# Altium PCB Base.PcbDoc (part 2 of 2)
Units mm, origin at the board's own origin, x right, y up, seen from the top; angles counter-clockwise.
Board outline 100 x 100 mm, 4 copper layers (Top Layer, Layer 1, Layer 2, Bottom Layer), stack 1.56 mm thick; 130 components, 105 nets, 399 pads, 222 vias.
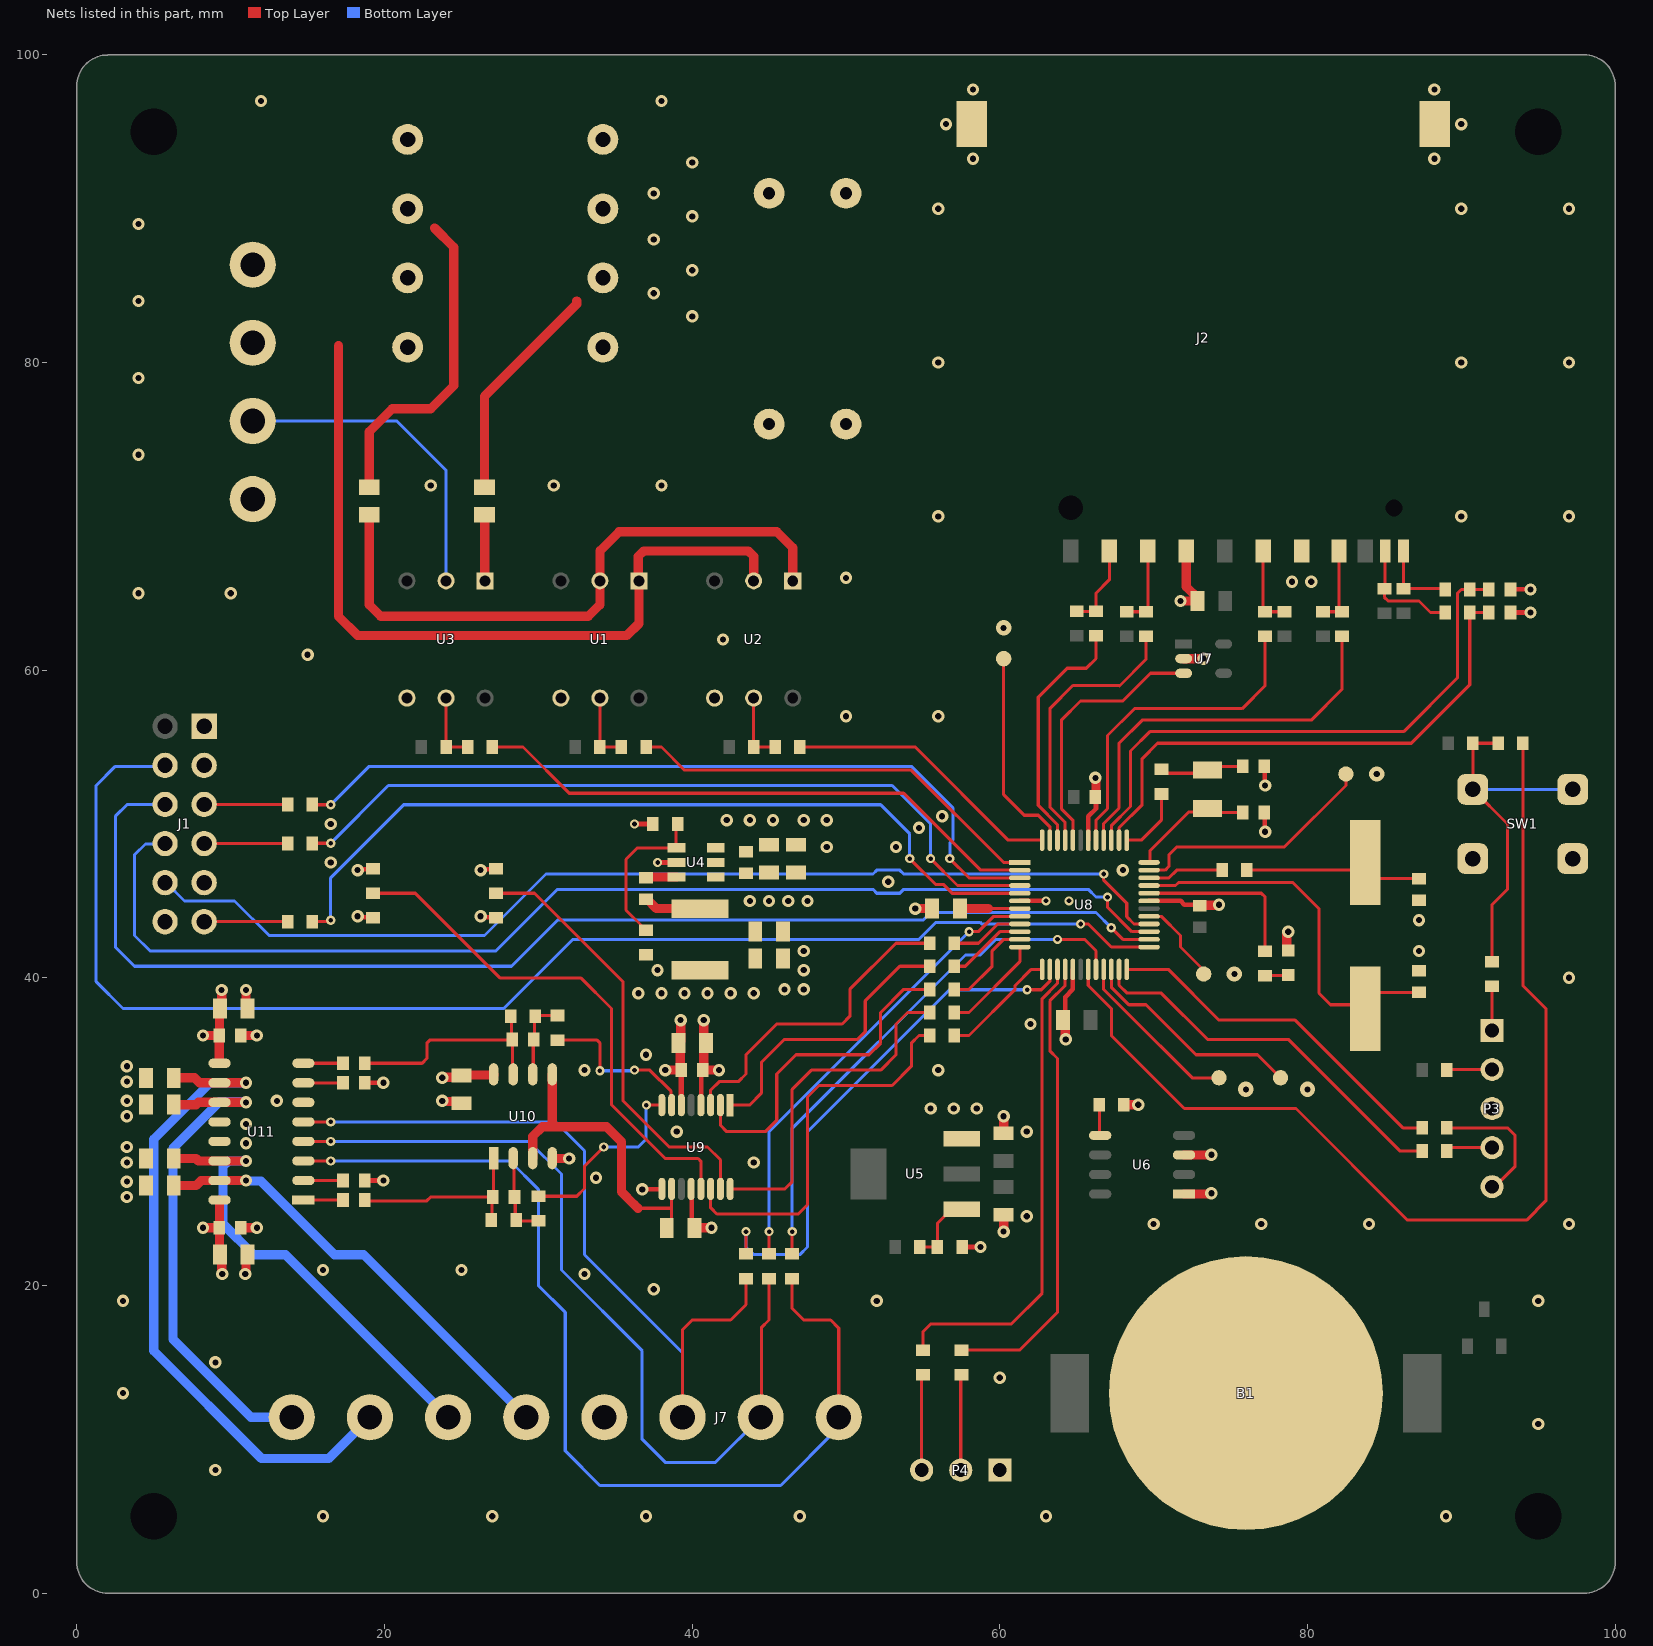
[diagram p4: the nets of this part, all layers, seen from the top]

## Via types
v1: diameter 0.8, hole 0.4, Top Layer to Bottom Layer, tented both sides, 190 vias
v2: diameter 0.6, hole 0.3, Top Layer to Bottom Layer, tented both sides, 27 vias
v3: diameter 1, hole 0.4, Top Layer to Bottom Layer, tented bottom, 5 vias

## Nets (pads, with @x,y where several pads share a name; then routed paths per layer and width w, separated by ;. In a path a pad name is that pad's centre, name@x,y a point inside that pad or via, vN(x,y) a via of type N, cw(c..) or ccw(c..) an arc to the next point about the centre after c; other vN are vias at no path point) (continued)
+5V: C7.1 C8.1 C23.1 C24.2 C26.1 C27.1 C28.2 C29.2 C39.1 L1.2 R11.2 R40.2 R41.2 U5.3 U9.6 U10.8 U11.9 U11.16 | length 23.9
  Top Layer w0.3: v1(18.25,47) 18.3,47.05 R40.2@19.177,47.05 ; v1(26.25,47) 26.3,47.05 R41.2@27.2,47.05
  Top Layer w0.36: U9.6@39.298,31.725 39.299,31.726 39.299,33.999 C24.2@39.3,34
  Top Layer w0.6: v1(8.2,23.75) C28.2@9.25,23.75 ; v1(8.2,36.25) C29.2@9.25,36.25 ; U11.16@9.275,25.555 9.263,25.555 9.263,23.763 C28.2@9.25,23.75 ; U11.9@9.275,34.445 9.25,34.445 C29.2@9.25,36.25 ; v1(9.412,39.212) 9.412,38.112 C26.1@9.3,38 9.275,37.975 9.275,36.275 C29.2@9.25,36.25 ; v1(9.45,20.75) 9.412,20.788 9.412,21.888 C27.1@9.3,22 9.275,22.025 9.275,23.725 C28.2@9.25,23.75 ; v1(23.75,33.5) 23.788,33.538 24.888,33.538 25.037,33.687 27.095,33.687 U10.8@27.095,33.725 ; v1(38.25,34) C24.2@39.3,34 39.225,34.075 39.225,35.875 39.25,35.9 v1(39.25,37.25)
  other v1: 55.5,31.5 57,31.5 58.5,31.5 36.5,39 38,39 39.5,39 41,39 42.5,39 44,39 37.75,40.5
+12V: C1.1 C2.1 C4.1 C5.1 C6.1 D1.K D3.K J1.1 R7.2 U4.3 U4.5 | length 16.2
  Top Layer w0.3: v2(37.75,47.5) U4.5@38.975,47.5
  Top Layer w0.6: R7.2@26.5,71.9 26.5,77.8 32.5,83.8 32.5,84 ; C2.1@44.621,91 C2.1@45,91
  other v1: 48.75,48.5 42.25,50.25 43.75,50.25 45.25,50.25 47.25,50.25 48.75,50.25 40,83 37.5,84.5 40,86 37.5,88 40,89.5 37.5,91 40,93
AC1: D1.A D2.K J3.1 R5.2 | length 21.5
  Top Layer w0.6: R5.2@19,71.9 19,75.5 20.5,77 23,77 24.5,78.5 24.5,87.5 23.25,88.75 ; D1.A@21.5,90 D1.A@21.879,90
AC2: D3.A D4.K J3.2 U1.1 U2.2 | length 52.1
  Top Layer w0.6: J3.2@11.43,81.28 J3.2@11.615,81.095 ; 17,81.095 17,63.5 18.25,62.25 35.75,62.25 36.54,63.04 36.54,66.025 36.5,66.065 36.5,67.399 36.851,67.75 43.649,67.75 44,67.399 U2.2@44,65.81 ; D4.K@21.405,81.095 D4.K@21.5,81
BCK: R42.2 U9.1 | length 19.1
  Top Layer w0.2: U9.1@42.473,31.725 43.725,31.725 44.5,32.5 44.5,34.5 46,36 50.75,36 51.25,36.5 51.25,38.5 53.5,40.75 R42.2@55.45,40.75
BST: C3.2 U4.6 | length 2
  Top Layer w0.6: C3.2@37,46.45 37.075,46.45 37.175,46.55 U4.6@38.975,46.55
"BTN DOWN": J1.6 U8.26 | length 81.9
  Top Layer w0.2: v2(67.25,43.25) 68,42.5 U8.26@69.7,42.5
  Bottom Layer w0.2: J1.6@5.73,51.27 3.27,51.27 2.5,50.5 2.5,42 3.75,40.75 28.25,40.75 31.25,43.75 55,43.75 55.5,44.25 66.25,44.25 v2(67.25,43.25)
"BTN PLAY": J1.10 U8.28 | length 69.4
  Top Layer w0.2: v2(66.75,46.75) 66.75,46.352 68.25,44.852 68.25,43.976 68.726,43.5 U8.28@69.7,43.5
  Bottom Layer w0.2: J1.10@5.73,46.19 5.81,46.19 7,45 10.25,45 12.5,42.75 26.5,42.75 30.5,46.75 51.75,46.75 52,47 53.5,47 53.75,46.75 v2(66.75,46.75)
"BTN SET": J1.4 U8.25 | length 89.9
  Top Layer w0.2: v2(65.25,43.5) 65.75,43.5 67.25,42 U8.25@69.7,42
  Bottom Layer w0.2: J1.4@5.73,53.81 5.67,53.75 2.5,53.75 1.25,52.5 1.25,39.75 3,38 27.75,38 32.25,42.5 54.75,42.5 55.852,43.602 58.725,43.602 58.827,43.5 v2(65.25,43.5)
"BTN UP": J1.8 U8.27 | length 77.3
  Top Layer w0.2: v2(67,45.25) 67,44.586 68.586,43 U8.27@69.7,43
  Bottom Layer w0.2: J1.8@5.73,48.73 5.705,48.705 4.455,48.705 3.75,48 3.75,42.75 4.75,41.75 27.25,41.75 31.25,45.75 51.75,45.75 52,45.5 53.5,45.5 53.75,45.75 65.75,45.75 66.25,45.25 v2(67,45.25)
"DAC BCK": R42.1 U8.10 | length 5.2
  Top Layer w0.2: R42.1@57.05,40.75 57.75,40.75 58.25,41.25 60,43 U8.10@61.3,43
"DAC DATA": R44.1 U8.11 | length 6.2
  Top Layer w0.2: R44.1@57.05,39.25 58,39.25 59.5,40.75 59.5,41.75 60.25,42.5 U8.11@61.3,42.5
"DAC LRCK": R43.1 U8.9 | length 4.8
  Top Layer w0.2: R43.1@57.05,42.25 58.61,42.25 59.86,43.5 U8.9@61.3,43.5
"DAC MUTE": R45.1 U8.13 | length 7.6
  Top Layer w0.2: R45.1@57.05,36.25 58,36.25 61,39.25 61,39.5 62.05,40.55 U8.13@62.75,40.55
"DAC SCK": R46.1 U8.12 | length 6.6
  Top Layer w0.2: R46.1@57.05,37.75 58,37.75 61.3,41.05 U8.12@61.3,42
DATA: R44.2 U9.2 | length 21.9
  Top Layer w0.2: U9.2@41.838,31.725 41.838,30.412 42.25,30 44.75,30 45.5,30.75 45.5,33.75 46.75,35 51.5,35 52.25,35.75 52.25,37.75 53.75,39.25 R44.2@55.45,39.25
DEMP: R40.1 R47.2 U9.13 | length 34
  Top Layer w0.2: R40.1@19.25,45.5 22,45.5 27.5,40 32.75,40 34.75,38 34.75,31.75 38.25,28.25 40.392,28.25 40.568,28.074 U9.13@40.568,26.275
DN: J7.2 R55.2 U11.5 | length 51.2
  Top Layer w0.2: U11.5@14.725,30.635 v2(16.5,30.635) ; J7.2@39.37,11.43 39.37,17.12 40,17.75 42.5,17.75 43.5,18.75 R55.2@43.5,20.45
  Bottom Layer w0.2: v2(16.5,30.635) 31.115,30.635 33,28.75 33,22 39.37,15.63 J7.2@39.37,11.43
"DSP CLK": R16.1 U8.5 | length 54.3
  Top Layer w0.2: R16.1@15.3,43.65 16.319,43.65 16.419,43.75 v2(16.5,43.75) ; v2(54.138,47.75) 55.814,46.074 56.324,46.074 56.898,45.5 U8.5@61.3,45.5 U8.5@61.5,45.5
  Bottom Layer w0.2: v2(16.5,43.75) 16.5,46.5 21.25,51.25 52.25,51.25 54.138,49.362 v2(54.138,47.75)
"DSP DATA": R15.1 U8.4 | length 51.6
  Top Layer w0.2: R15.1@15.3,48.73 15.32,48.75 v2(16.5,48.75) ; v2(55.5,47.75) 57.25,46 U8.4@61.3,46
  Bottom Layer w0.2: v2(16.5,48.75) 20.25,52.5 53,52.5 55.5,50 v2(55.5,47.75)
"DSP LATCH": R14.1 U8.3 | length 52.3
  Top Layer w0.2: R14.1@15.3,51.27 15.32,51.25 v2(16.5,51.25) ; v2(56.75,47.75) 58,46.5 U8.3@61.3,46.5
  Bottom Layer w0.2: v2(16.5,51.25) 19,53.75 54.25,53.75 56.952,51.048 56.952,50.209 56.952,48.952 56.75,48.75 v2(56.75,47.75)
FB: R11.1 R13.2 U4.4 | length 10.6
  Top Layer w0.2: R11.1@37,43.1 36.925,43.1 36.7,43.325 36.7,43.4 35.7,44.4 35.7,47.7 36.45,48.45 U4.4@38.975,48.45 38.95,48.475 R13.2@38.95,50.25
FMT: R41.1 R48.2 U9.15 | length 28.2
  Top Layer w0.2: R48.2@27.25,45.5 29.75,45.5 35.5,39.75 35.5,32 38.5,29 41,29 41.838,28.162 U9.15@41.838,26.275
GND: B1.2 C1.2 C2.2 C4.2 C5.2 C6.2 C7.2 C8.2 C9.2 C10.2 C11.2 C12.1 C13.1 C14.2 C15.1 C16.1 C17.2 C18.2 C19.2 C20.2 C21.2 C22.2 C23.2 C24.1 C26.2 C27.2 C28.1 C29.1 C32.1 C34.1 C35.1 C36.1 C37.1 C38.1 C39.2 D2.A D4.A D6.K J1.3 J1.9 J1.12 J2.3 J2.6 J2.MP J4.2 J7.1 P3.3 P4.1 R9.2 R12.1 R13.1 R47.1 R48.1 SW1.1 U1.4 U2.4 U3.4 U4.1 U6.1 U6.3 U7.2 U8.6 U8.17 U8.31 U8.42 U9.4 U9.9 U9.12 U10.4 U11.6 U11.12 U11.13 | length 61.7
  Top Layer w0.3: U11.13@9.275,29.365 U11.13@9.332,29.308 ; v1@10.942,29.308 v1(11,29.25) ; v1(18.25,44) 18.3,43.95 19.2,43.95 R47.1@19.25,43.9 ; C32.1@18.7,26.825 v1(19.925,26.825) ; C34.1@18.7,33.175 v1(19.925,33.175) ; v1(26.25,44) 26.3,43.95 27.1,43.95 27.15,44 R48.1@27.25,43.9 ; v2(36.25,50) R13.1@37.45,50 ; v1(36.75,26.25) 38.002,26.25 U9.9@38.028,26.275 ; U9.12@39.933,26.275 39.961,26.246 39.961,23.939 C22.2@40.15,23.75 ; U9.4@40.568,31.725 40.596,31.754 40.596,33.896 C24.1@40.7,34 ; R12.1@57.546,22.5 v1(58.75,22.5) ; U8.6@61.3,45 v2(63,45) ; C14.2@64.1,37.25 64.25,37.4 64.25,38.75 64.749,39.249 64.749,39.499 U8.17@64.75,40.55 ; U8.42@65.75,48.95 65.75,50.5 66.25,51 66.25,51.6 C16.1@66.4,51.75 ; U8.31@69.7,45 71.75,45 72,44.75 C15.1@72.95,44.75 ; C21.2@77.2,50.75 77.225,50.725 77.225,49.525 v1(77.25,49.5) ; C20.2@77.2,53.75 77.225,53.725 77.225,52.525 v1(77.25,52.5) ; C13.1@93.2,63.75 v1(94.5,63.75) ; C12.1@93.2,65.25 v1(94.5,65.25)
  Top Layer w0.6: C28.1@10.65,23.75 v1(11.7,23.75) ; C29.1@10.65,36.25 v1(11.7,36.25) ; v1(10.95,20.75) 10.988,20.788 10.988,21.888 C27.2@11.1,22 ; v1(10.988,39.212) 10.988,38.112 C26.2@11.1,38 ; v1(23.75,32) 23.788,31.962 24.888,31.962 C39.2@25,31.85 ; U10.4@30.905,28.275 30.905,28.262 31.988,28.262 v1(32,28.25) ; C22.2@40.15,23.75 v1(41.25,23.75) ; v1(40.75,37.25) 40.75,35.9 C23.2@40.9,35.75 40.75,35.6 40.75,34.05 C24.1@40.7,34 v1(41.75,34) ; v1(54.5,44.5) C17.2@55.6,44.5 ; v1(60.25,23.5) C9.2@60.25,24.6 ; C10.2@60.25,29.9 v1(60.25,31) ; C14.2@64.1,37.25 64.25,37.1 64.25,36.038 v1(64.288,36) ; v1(66.212,53) 66.25,52.962 C16.1@66.25,51.9 ; R9.2@68.05,31.75 v1(69,31.75) ; v1(71.75,64.5) C11.2@72.85,64.5 72.85,64.7 72.12,65.43 J2.3@72.12,67.75 ; U7.2@71.95,60.75 v1(73.25,60.75) ; U6.1@71.975,25.945 73.641,25.945 73.696,26 v1(73.75,26) ; U6.3@71.975,28.485 73.735,28.485 v1(73.75,28.5) ; C15.1@72.95,44.75 72.975,44.725 74.225,44.725 v1(74.25,44.75) ; D6.K@78.75,41.802 78.723,41.802 78.648,41.877 78.648,42.898 v1(78.75,43)
  other v1: 16,5 27,5 37,5 47,5 63,5 89,5 9,8 95,11 3,13 60,14 9,15 3,19 52,19 95,19 37.5,19.75 33,20.75 16,21 25,21 70,24 77,24 84,24 97,24 61.75,24.5 3.25,25.75 3.25,26.75 33.75,27 3.25,28 44,28 3.25,29 39,30 61.75,30 11,30.5 3.25,31 3.25,32 13,32 3.25,33.25 33,34 56,34 3.25,34.25 37,35 62,37 46,39.25 47.25,39.25 97,40 47.25,40.5 47.25,41.75 87.25,41.75 87.25,43.75 43.75,45 45,45 46.25,45 47.5,45 52.75,46.25 68,47 16.5,47.5 53.25,48.5 54.75,49.75 16.5,50 56.25,50.5 50,57 56,57 15,61 42,62 4,65 10,65 79,65.75 80.25,65.75 50,66 56,70 90,70 97,70 23,72 31,72 38,72 4,74 4,79 56,80 90,80 97,80 4,84 4,89 56,90 90,90 97,90 58.25,93.25 88.25,93.25 56.5,95.5 90,95.5 11.971,97 38,97 58.25,97.75 88.25,97.75
  other v2: 64.5,45
  other v3: 76,32.75 80,32.75 75.25,40.25 84.5,53.25 60.25,62.75
"ICSP MCLR": R29.2 R33.1 R34.1 SW1.2 | length 23.7
  Top Layer w0.2: R29.2@92,41.05 92,44.75 93,45.75 93,50 SW1.2@90.75,52.25 R33.1@90.75,55.25 R34.1@92.4,55.25
  Bottom Layer w0.2: SW1.2@90.75,52.25 SW1.2@97.25,52.25
"ICSP PGC": R32.2 U8.24 | length 23.5
  Top Layer w0.2: U8.24@68.25,40.55 70.95,40.55 74.25,37.25 79.2,37.25 86.2,30.25 R32.2@87.45,30.25
"ICSP PGD": R31.2 U8.23 | length 25.2
  Top Layer w0.2: U8.23@67.75,40.55 67.75,39.525 68.275,39 70.5,39 73.5,36 78.75,36 86,28.75 R31.2@87.45,28.75
LDAC: R54.2 U9.7 | length 10.8
  Top Layer w0.2: R54.2@31.25,35.95 33.824,35.95 34,35.774 v2(34,33.959) ; v2(36.25,34) 37.25,34 38.634,32.616 38.634,31.754 U9.7@38.663,31.725
  Bottom Layer w0.2: v2(34,33.959) 36.209,33.959 v2(36.25,34)
LED: R35.1 U8.32 | length 11.2
  Top Layer w0.2: U8.32@69.7,45.5 77,45.5 77.248,45.252 R35.1@77.248,41.727
"LINE PULSE N": R6.1 U8.48 | length 18.3
  Top Layer w0.2: R6.1@47,55 54.5,55 60.55,48.95 U8.48@62.75,48.95
"LINE PULSE P": R4.1 U8.1 | length 27.4
  Top Layer w0.2: R4.1@37,55 38,55 39.5,53.5 54.25,53.5 60.25,47.5 U8.1@61.3,47.5
LINN: C34.2 U11.7 | length 2.6
  Top Layer w0.2: U11.7@14.725,33.175 C34.2@17.3,33.175
LINP: C33.2 U11.8 | length 2.6
  Top Layer w0.2: U11.8@14.725,34.445 C33.2@17.3,34.445
LOUTN: C38.2 J6.1 U11.11 | length 33
  Top Layer w0.6: C38.2@6.3,31.75 7.75,31.75 7.905,31.905 U11.11@9.275,31.905 v1(11,31.905)
  Bottom Layer w0.6: v1(11,31.905) 10.962,31.943 9.269,31.943 6.25,28.925 6.25,16.5 11.32,11.43 J6.1@13.97,11.43
LOUTP: C37.2 J6.2 U11.10 | length 44.2
  Top Layer w0.6: C37.2@6.3,33.5 7.65,33.5 7.975,33.175 U11.10@9.275,33.175 v1(11,33.175)
  Bottom Layer w0.6: v1(11,33.175) 8.675,33.175 5,29.5 5,15.75 12,8.75 16.37,8.75 J6.2@19.05,11.43
LRCK: R43.2 U9.3 | length 20.9
  Top Layer w0.2: U9.3@41.203,31.725 41.203,32.703 41.75,33.25 43,33.25 43.5,33.75 43.5,35 45.5,37 49.75,37 50.25,37.5 50.25,39.25 53.25,42.25 R43.2@55.45,42.25
MCLR: R34.2 U8.19 | length 69
  Top Layer w0.2: U8.19@65.75,40.55 65.75,39.5 67.25,38 67.25,36.25 72,31.5 79.25,31.5 86.5,24.25 94.25,24.25 95.5,25.5 95.5,38 94,39.5 R34.2@94,55.25
NetC18_1: C18.1 R36.1 X1.2 | length 11.8
  Top Layer w0.2: R36.1@76.05,47 83.25,47 X1.2@83.75,47.5 ; X1.2@83.75,47.3 84.6,46.45 C18.1@87.25,46.45
NetC20_1: C20.1 R39.1 X2.2 | length 5.7
  Top Layer w0.2: R39.1@70.25,53.3 73.3,53.3 X2.2@73.5,53.5 73.75,53.75 C20.1@75.8,53.75
NetC25_1: C25.1 R49.1 R50.1 U10.2 | length 5.6
  Top Layer w0.2: U10.2@28.365,28.275 28.408,28.232 28.408,25.792 C25.1@28.45,25.75 28.5,25.7 28.5,24.3 R49.1@28.55,24.25 28.6,24.2 R50.1@30,24.2
NetC25_2: C25.2 C31.1 R49.2 U10.1 | length 12.6
  Top Layer w0.2: C31.1@18.7,25.555 18.755,25.5 22.75,25.5 23,25.75 C25.2@27.05,25.75 ; R49.2@26.95,24.25 27,24.3 27,25.7 C25.2@27.05,25.75 ; U10.1@27.095,28.275 27.073,28.252 27.073,25.773 C25.2@27.05,25.75
NetC30_1: C30.1 R51.1 R54.1 U10.6 | length 5.3
  Top Layer w0.2: U10.6@29.635,33.725 29.668,33.757 29.668,35.967 C30.1@29.7,36 29.75,36.05 29.75,37.45 R51.1@29.8,37.5 29.85,37.55 R54.1@31.25,37.55
NetC30_2: C30.2 C33.1 R51.2 U10.7 | length 14.6
  Top Layer w0.2: C33.1@18.7,34.445 22.445,34.445 22.75,34.75 22.75,35.75 22.967,35.967 28.267,35.967 C30.2@28.3,36 28.25,36.05 28.25,37.45 R51.2@28.2,37.5 ; C30.2@28.333,35.967 28.333,33.757 U10.7@28.365,33.725
NetD6_A: D6.A R35.2 | length 1.5
  Top Layer w0.2: R35.2@77.248,40.127 77.273,40.152 78.723,40.152 D6.A@78.748,40.177
NetJ1_5: J1.5 R14.2 | length 5.4
  Top Layer w0.2: J1.5@8.27,51.27 R14.2@13.7,51.27
NetJ1_7: J1.7 R15.2 | length 5.4
  Top Layer w0.2: J1.7@8.27,48.73 R15.2@13.7,48.73
NetJ1_11: J1.11 R16.2 | length 5.4
  Top Layer w0.2: J1.11@8.27,43.65 R16.2@13.7,43.65
NetJ2_1: J2.1 R17.1 R23.2 | length 5.5
  Top Layer w0.2: R17.1@65,63.825 R23.2@66.25,63.825 66.25,65 67.12,65.87 J2.1@67.12,67.75
NetJ2_2: J2.2 R18.1 R24.2 | length 5.1
  Top Layer w0.2: R18.1@68.25,63.8 R24.2@69.5,63.8 ; R24.2@69.62,63.87 J2.2@69.62,67.75
NetJ2_5: J2.5 R19.1 R25.2 | length 5.4
  Top Layer w0.2: R25.2@77.12,63.63 J2.5@77.12,67.75 ; R25.2@77.25,63.8 R19.1@78.5,63.8
NetJ2_7: J2.7 R20.1 R26.2 | length 5.2
  Top Layer w0.2: R20.1@81,63.8 R26.2@82.05,63.8 ; J2.7@82.05,67.75 R26.2@82.05,63.8 ; R26.2@82.25,63.8 R26.2@82.05,63.8
NetJ2_10: J2.10 R22.1 R28.2 | length 7.4
  Top Layer w0.2: J2.10@85.05,67.75 85.05,65.35 R22.1@85,65.3 85,64.75 85.25,64.5 87.25,64.5 88,63.75 R28.2@88.95,63.75
NetJ2_11: J2.11 R21.1 R27.2 | length 5.2
  Top Layer w0.2: J2.11@86.3,67.7 J2.11@86.25,67.75 R21.1@86.25,65.3 88.9,65.3 R27.2@88.95,65.25
NetP3_1: P3.1 R29.1 | length 2.9
  Top Layer w0.2: P3.1@92,36.58 R29.1@92,39.45
NetP3_2: P3.2 R30.1 | length 3
  Top Layer w0.2: R30.1@89.05,34 89.09,34.04 P3.2@92,34.04
NetP3_4: P3.4 R31.1 | length 3.1
  Top Layer w0.2: R31.1@89.05,28.5 R31.1@89.05,28.575 ; R31.1@89.05,28.75 89.26,28.96 P3.4@92,28.96
NetP3_5: P3.5 R32.1 | length 8.7
  Top Layer w0.2: R32.1@89.05,30.25 93,30.25 93.5,29.75 93.5,27.75 92.17,26.42 P3.5@92,26.42
NetP4_2: P4.2 R38.2 | length 6.2
  Top Layer w0.2: P4.2@57.46,8 57.46,14.16 R38.2@57.5,14.2
NetP4_3: P4.3 R37.2 | length 6.2
  Top Layer w0.2: P4.3@54.92,8 54.92,14.12 R37.2@55,14.2
NetR1_1: R1.1 R4.2 U1.5 | length 4.6
  Top Layer w0.2: U1.5@34,58.19 R1.1@34,55 R4.2@35.4,55
NetR2_1: R2.1 R6.2 U2.5 | length 4.6
  Top Layer w0.2: U2.5@44,58.19 R2.1@44,55 R6.2@45.4,55
NetR3_1: R3.1 R8.2 U3.5 | length 4.6
  Top Layer w0.2: U3.5@24,58.19 R3.1@24,55 R8.2@25.4,55
NetR5_1: R5.1 U1.2 U2.1 | length 40.6
  Top Layer w0.6: R5.1@19,70.1 19,64.25 19.75,63.5 33.25,63.5 34,64.25 U1.2@34,65.81 34.015,65.825 34.015,67.765 35.25,69 45.5,69 46.54,67.96 U2.1@46.54,65.81
NetR7_1: R7.1 U3.1 | length 4.3
  Top Layer w0.6: R7.1@26.5,70.1 26.52,70.08 26.52,65.83 U3.1@26.54,65.81
NetR9_1: R9.1 U6.5 | length 2
  Top Layer w0.2: R9.1@66.45,31.75 66.487,31.713 66.487,29.793 U6.5@66.525,29.755
NetR10_1: R10.1 R12.2 U5.1 | length 4.6
  Top Layer w0.2: R10.1@54.796,22.5 R12.2@55.946,22.5 55.946,24.05 56.846,24.95 U5.1@57.521,24.95
NetR45_2: R45.2 U9.14 | length 25.4
  Top Layer w0.2: U9.14@41.203,26.275 41.203,25.047 41.601,24.649 46.899,24.649 47.5,25.25 47.5,32.25 48.25,33 53,33 54.25,34.25 54.25,35.75 54.75,36.25 R45.2@55.45,36.25
NetTP1_1: TP1.1 U8.22 | length 14.7
  Top Layer w0.2: U8.22@67.25,40.55 67.25,39.385 68.385,38.25 69.5,38.25 72.75,35 76.75,35 TP1.1@78.25,33.5 ; TP1.1@78.318,33.622 TP1.1@78.434,33.622
NetTP2_1: TP2.1 U8.35 | length 16.3
  Top Layer w0.2: U8.35@69.7,47 70.75,47 71,47.25 71,48 71.5,48.5 78.5,48.5 82.5,52.5 TP2.1@82.5,53.25
NetTP3_1: TP3.1 U8.21 | length 11.2
  Top Layer w0.2: U8.21@66.75,40.55 66.75,39.245 68.245,37.75 68.25,37.75 72.5,33.5 TP3.1@74.25,33.5
NetTP4_1: TP4.1 U8.47 | length 13.6
  Top Layer w0.2: TP4.1@60.25,60.75 60.25,51.91 61.59,50.57 62.5,50.57 63.25,49.82 U8.47@63.25,48.95
NetTP5_1: TP5.1 U8.29 | length 5.8
  Top Layer w0.2: U8.29@69.7,44 70.5,44 71.75,42.75 71.75,42 TP5.1@73.5,40.25
OSCI: C19.1 U8.33 X1.1 | length 24.6
  Top Layer w0.2: U8.33@69.7,46 71.419,46 71.622,46.202 79.048,46.202 80.75,44.5 80.75,39 81.5,38.25 83.5,38.25 X1.1@83.75,38 ; X1.1@83.75,38.2 84.6,39.05 C19.1@87.25,39.05
OSCO: R36.2 U8.34 | length 5
  Top Layer w0.2: U8.34@69.7,46.5 71,46.5 71.5,47 R36.2@74.45,47
"PA DN": R55.1 U8.14 | length 35
  Top Layer w0.2: v2(43.5,23.5) 43.5,22.3 R55.1@43.75,22.05 ; v2(61.775,39.225) 62.695,39.225 63.25,39.78 U8.14@63.25,40.55
  Bottom Layer w0.2: v2(43.5,23.5) 43.5,22.5 44,22 47,22 47.5,22.5 47.5,30 56.725,39.225 v2(61.775,39.225)
"PA SD": R52.1 U8.20 | length 34.5
  Top Layer w0.2: R52.1@46.5,22.05 v2(46.5,23.5) ; v2(63.75,42.5) 65.5,42.5 66.25,41.75 U8.20@66.25,40.55
  Bottom Layer w0.2: v2(46.5,23.5) 46.5,30.219 57.766,41.484 58.734,41.484 59.75,42.5 v2(63.75,42.5)
"PA UP": R53.1 U8.8 | length 30
  Top Layer w0.2: R53.1@45,22.05 v2(45,23.5) ; v2(58,43) 58.602,43 59.602,44 U8.8@61.3,44
  Bottom Layer w0.2: v2(45,23.5) 45,30 v2(58,43)
RDAC: R50.2 U9.8 | length 12.7
  Top Layer w0.2: R50.2@30,25.8 32.5,25.8 33,26.3 33,27.75 v2(34.25,29) ; v2@37,31.75 v2(37.025,31.725) U9.8@38.028,31.725
  Bottom Layer w0.2: v2(34.25,29) 36.5,29 37,29.5 37,31.7 v2(37.025,31.725)
RINN: C32.2 U11.2 | length 2.6
  Top Layer w0.2: U11.2@14.725,26.825 C32.2@17.3,26.825
RINP: C31.2 U11.1 | length 2.6
  Top Layer w0.2: U11.1@14.725,25.555 C31.2@17.3,25.555
ROUTN: C36.2 J5.1 U11.14 | length 30.1
  Top Layer w0.6: C36.2@6.3,28.1 6.45,28.25 7.75,28.25 7.905,28.095 U11.14@9.275,28.095 v1(11,28.095)
  Bottom Layer w0.6: v1(11,28.095) 9.851,28.095 9.5,27.744 9.5,24 11.5,22 13.56,22 J5.1@24.13,11.43
ROUTP: C35.2 J5.2 U11.15 | length 29.4
  Top Layer w0.6: C35.2@6.3,26.5 6.45,26.5 7.75,26.5 8.075,26.825 U11.15@9.275,26.825 v1(11,26.825)
  Bottom Layer w0.6: v1(11,26.825) 11.038,26.787 11.963,26.787 16.75,22 18.64,22 J5.2@29.21,11.43
SCK: R46.2 U9.16 | length 22.4
  Top Layer w0.2: U9.16@42.473,26.275 46.025,26.275 46.5,26.75 46.5,32.75 47.75,34 52.25,34 53.25,35 53.25,37 54,37.75 R46.2@55.45,37.75
SD: J7.4 R52.2 U11.3 | length 66
  Top Layer w0.2: U11.3@14.725,28.095 v2(16.5,28.095) ; R52.2@46.5,20.45 46.5,18.5 47.25,17.75 49,17.75 49.53,17.22 J7.4@49.53,11.43
  Bottom Layer w0.2: v2(16.5,28.095) 28.155,28.095 30,26.25 30,20 31.75,18.25 31.75,9.25 34,7 45.75,7 49.53,10.78 J7.4@49.53,11.43
"SD CD": C13.2 R28.1 U8.38 | length 35.2
  Top Layer w0.2: U8.38@67.75,48.95 67.75,49.75 69.25,51.25 69.25,54.25 70.25,55.25 86.75,55.25 90.55,59.05 R28.1@90.55,63.75 C13.2@91.8,63.75
"SD CLK": R25.1 U8.41 | length 21.9
  Top Layer w0.2: U8.41@66.25,48.95 66.25,50.25 67,51 67,55.75 68.75,57.5 75.75,57.5 77.25,59 R25.1@77.25,62.2
"SD CS": R23.1 U8.46 | length 16.1
  Top Layer w0.2: U8.46@63.75,48.95 63.75,49.96 62.5,51.21 62.5,58.25 64.375,60.125 65.625,60.125 66.25,60.75 R23.1@66.25,62.225
"SD MISO": R26.1 U8.40 | length 26.1
  Top Layer w0.2: U8.40@66.75,48.95 66.75,50.03 67.75,51.03 67.75,55.25 69.25,56.75 80.25,56.75 82.25,58.75 R26.1@82.25,62.2
"SD MOSI": R24.1 U8.45 | length 18.1
  Top Layer w0.2: U8.45@64.25,48.95 64.25,50.1 63.25,51.1 63.25,57.5 64.75,59 67.75,59 67.775,58.975 69.5,60.7 R24.1@69.5,62.2
"SD PWR EN": U7.3 U8.44 | length 17.3
  Top Layer w0.2: U8.44@64.75,48.95 64.75,50.25 64,51 64,56.75 65.25,58 68,58 69.8,59.8 U7.3@71.95,59.8
"SD WP": C12.2 R27.1 U8.39 | length 37.2
  Top Layer w0.2: U8.39@67.25,48.95 67.25,49.89 68.5,51.14 68.5,54.75 69.75,56 86.25,56 89.75,59.5 89.75,65 90,65.25 R27.1@90.55,65.25 C12.2@91.8,65.25
SNOOZE: R8.1 U8.2 | length 37.6
  Top Layer w0.2: R8.1@27,55 29,55 32,52 53.75,52 58.75,47 U8.2@61.3,47
"SNOZE IN": J4.1 U3.2 | length 21.1
  Bottom Layer w0.2: J4.1@11.43,76.2 20.8,76.2 24,73 U3.2@24,65.81
SOSCI: C21.1 U8.36 X2.1 | length 8.1
  Top Layer w0.2: U8.36@69.7,47.5 69.75,47.5 69.75,48.25 72.276,50.776 73.276,50.776 X2.1@73.5,51 73.75,50.75 C21.1@75.8,50.75
SOSCO: R39.2 U8.37 | length 4.5
  Top Layer w0.2: U8.37@68.25,48.95 69.2,48.95 70.5,50.25 R39.2@70.5,51.95
SW: C3.1 L1.1 U4.2 | length 3.7
  Top Layer w0.6: C3.1@37,45.1 37.075,45.1 37.675,44.5 L1.1@40.5,44.5
"UART RX": R38.1 U8.16 | length 30.2
  Top Layer w0.2: R38.1@57.5,15.8 61.3,15.8 63.25,17.75 63.75,18.25 63.75,34.75 63.25,35.25 63.25,38.5 64.25,39.5 U8.16@64.25,40.55
"UART TX": R37.1 U8.15 | length 31.4
  Top Layer w0.2: R37.1@55,15.8 55,17 55.5,17.5 60.75,17.5 62.75,19.5 62.75,38.64 63.75,39.64 U8.15@63.75,40.55
UP: J7.3 R53.2 U11.4 | length 55.9
  Top Layer w0.2: U11.4@14.725,29.365 v2(16.5,29.365) ; J7.3@44.45,11.43 44.5,11.48 44.5,17.25 45,17.75 R53.2@45,20.45
  Bottom Layer w0.2: v2(16.5,29.365) 29.385,29.365 31.5,27.25 31.5,21 36.75,15.75 36.75,10 38.25,8.5 41.52,8.5 J7.3@44.45,11.43
VCAP: C17.1 U8.7 | length 3.9
  Top Layer w0.2: 59.25,44.5 U8.7@61.3,44.5
  Top Layer w0.6: C17.1@57.4,44.5 59.25,44.5
VCOM: C22.1 U9.10 U10.3 U10.5 | length 20.7
  Top Layer w0.2: 36.473,25.019 38.663,25.019 ; C22.1@38.65,23.75 38.663,23.762 38.663,25.019 ; U9.10@38.663,26.275 38.663,25.019
  Top Layer w0.6: U10.3@29.635,28.275 29.635,29.69 30.27,30.325 30.905,30.325 ; U10.5@30.905,33.725 30.905,30.325 ; 36.473,25.019 36.242,25.25 36.242,25.258 35.401,26.099 35.401,29.349 34.425,30.325 30.905,30.325
pads on no net: B1.1@64.55,13 D5.2 J2.8 J2.9 J2.13 U1.3 U1.6 U2.3 U2.6 U3.3 U3.6 U6.2 U6.4 U7.4 U9.5 U9.11

## Polygon pours and split planes (outlines as drawn)
GND on Top Layer "GND Top" (solid, remove dead copper, pour order 15): 1,99 99,99 99,1 1,1
+12V on Top Layer "+12V" (solid, remove dead copper, pour order 3): 32,92 32,83.5 38,83.5 40.5,81 40.5,72.5 47,72.5 47,94.5 40.5,94.5 38,92
AC2 on Top Layer "AC2" (solid, remove dead copper, pour order 2): 23.5,87 23.5,79 9,79 9,83 9.5,83.5 16,83.5 19.5,87
AC1 on Top Layer "AC1" (solid, remove dead copper, pour order 1): 15,84 19,88 23.5,88 23.5,96.5 18,96.5 9,87.5 9,84
GND on Top Layer "GND Boost" (solid, remove dead copper, pour order 8): 49.75,47.5 49.75,38.25 45,38.25 45,44 43.25,44 43.25,45.75 41,45.75 41,47 42.5,47 42.5,47.5
+3V3 on Top Layer "+3V3 LDO" (solid, remove dead copper, pour order 13): 59.25,29 62.5,29 62.5,25.5 59.5,25.5 58.75,26.25 55.25,26.25 54,25 54,21.5 48.25,21.5 48.25,32.25 54,32.25 54,29.5 55.25,28.25 58.375,28.25
+5V on Top Layer "+5V LDO" (solid, remove dead copper, pour order 14): 54.25,32.25 54.25,29.75 55.5,28.5 58.25,28.5 59.25,29.5 59.25,32.25
+5V on Top Layer "+5V Boost" (solid, remove dead copper, pour order 7): 36,42 36,38.25 44.75,38.25 44.75,44 43.25,44 43.25,43.048 38.2,43.048 38.2,42
SW on Top Layer "SW Boost" (solid, remove dead copper, pour order 6): 42.25,47.25 42.25,48 39.75,48 39.75,45.5 38.25,45.5 38.25,43.5 42.75,43.5 42.75,45.5 40.75,45.5 40.75,47.25
+12V on Top Layer "+12V Boost" (solid, remove dead copper, pour order 5): 40.5,48 42.5,48 42.75,47.75 49.75,47.75 49.75,51.25 41.5,51.25 41.5,49.25 40.5,49.25
+3V3 on Layer 2 "+3V3 Layer2" (solid, remove dead copper, pour order 10): 1,58 6,58 6,54 14,54 14,56 42,56 42,54 36,54 36,46 51,46 51,67 72.5,67 72.5,62.5 58,62.5 58,40 66,32 66,1 1,1
"+3V3 PIC" on Layer 2 "+3V3 Layer2" (solid, remove dead copper, pour order 11): 59,58 99,58 99,1 67,1 67,32 59,40
+12V on Layer 2 "+12V layer2" (solid, remove dead copper, pour order 4): 7,55 7,59 1,59 1,99 50,99 50,47 37,47 37,53 43,53 43,57 11,57 11,55
+5V on Layer 2 "+5V Layer2" (solid, remove dead copper, pour order 9): 7,41 17,41 17,48 27,48 27,41 44,41 44,35 59,35 59,31 55,31 55,33 44,33 44,20 7,20
"+3V3 SD" on Layer 2 "+3V3 SD" (solid, remove dead copper, pour order 16): 51,67.5 51,99 99,99 99,58.5 59,58.5 59,62 73,62 73,67.5
GND on Layer 1 "GND" (solid, remove dead copper, pour order 0): 1,99 99,99 99,1 1,1
GND on Bottom Layer "GND Bottom" (solid, remove dead copper, pour order 12): 1,99 99,99 99,1 1,1

## Silkscreen, mask and mechanical layers (free items; w line width, h text height)
Top Overlay:
  circle w0.2: c5,95 r3.5
  circle w0.2: c95,95 r3.5
  circle w0.2: c95,5 r3.5
  circle w0.2: c5,5 r3.5
  lines w0.2: 18.25,43 23.25,43 24.75,44.5 24.75,51 18.25,51 18.25,43 ; 26.25,43 26.25,51 32.75,51 32.75,44.5 31.25,43 26.25,43
  text "AC1" at 1.3,85.71 h1.3
  text "AC2" at 1.3,80.63 h1.3
  text "SNZ" at 1.3,75.55 h1.3
  text "GND" at 1,70.058 h1.3
  text "DISPLAY" at 1.8,60.3 h1.4
  text "FMT" at 26.25,48.5 h1.4
  text "DEMP" at 18.25,48.484 h1.4
  text "ON" at 20.95,46.2 h1
  text "16b" at 28.45,46.2 h1
  text "OFF" at 20.95,44.2 h1
  text "I2S" at 28.45,44.2 h1
  text "RESET" at 90.734,43.3 h1.4
  text "DAC SETTINGS" at 17.101,40.5 h1.4
  text "VPP" at 94.55,35.93 h1.3
  text "VDD" at 94.55,33.39 h1.3
  text "GND" at 94.55,30.85 h1.3
  text "PGD" at 94.55,28.31 h1.3
  text "PGC" at 94.55,25.77 h1.3
  text "ICSP" at 89.551,22.3 h1.4
  text "SPEAKERS" at 15.8,17.3 h1.4
  text "CTRL OVERRIDE" at 32.3,17.3 h1.4
  text "UART" at 54.894,10.8 h1.4
  text "LN" at 14.62,1.3 h1.3 r90
  text "LP" at 19.7,1.3 h1.3 r90
  text "RN" at 24.78,1.3 h1.3 r90
  text "RP" at 29.86,1.3 h1.3 r90
  text "GND" at 34.94,1.3 h1.3 r90
  text "DWN" at 40.02,1.3 h1.3 r90
  text "UP" at 45.1,1.3 h1.3 r90
  text "SD" at 50.18,1.3 h1.3 r90
  text "RX" at 55.57,1.3 h1.3 r90
  text "TX" at 58.11,1.3 h1.3 r90
  text "GND" at 60.65,1.3 h1.3 r90
Bottom Overlay:
  text "'.ProjectTitle'" at 90,15.071 h6
  text "'.ProjectRevision' '.Print_Date'" at 90,12.035 h3
  text "'.GitHub'" at 90,2.569 h3
Outline:
  lines w0.8: 2,99.99 ccw(c2,97.99) 0,97.99 0,2 ccw(c2,2) 2,0 98,0 ccw(c98,2) 100,2 100,98 ccw(c98,98) 98,100 2,100

## Text inside footprints (layer, text, board x,y; h text height)
B1: Top Overlay "CR2032" at 72.035,1.3 h1.4